# Altium PCB JSTCJ.PcbDoc
Units mm, origin at the board's own origin, x right, y up, seen from the top; angles counter-clockwise.
Board outline 50 x 50 mm, 2 copper layers (Top Layer, Bottom Layer); 15 components, 3 nets, 32 pads, 9 vias.
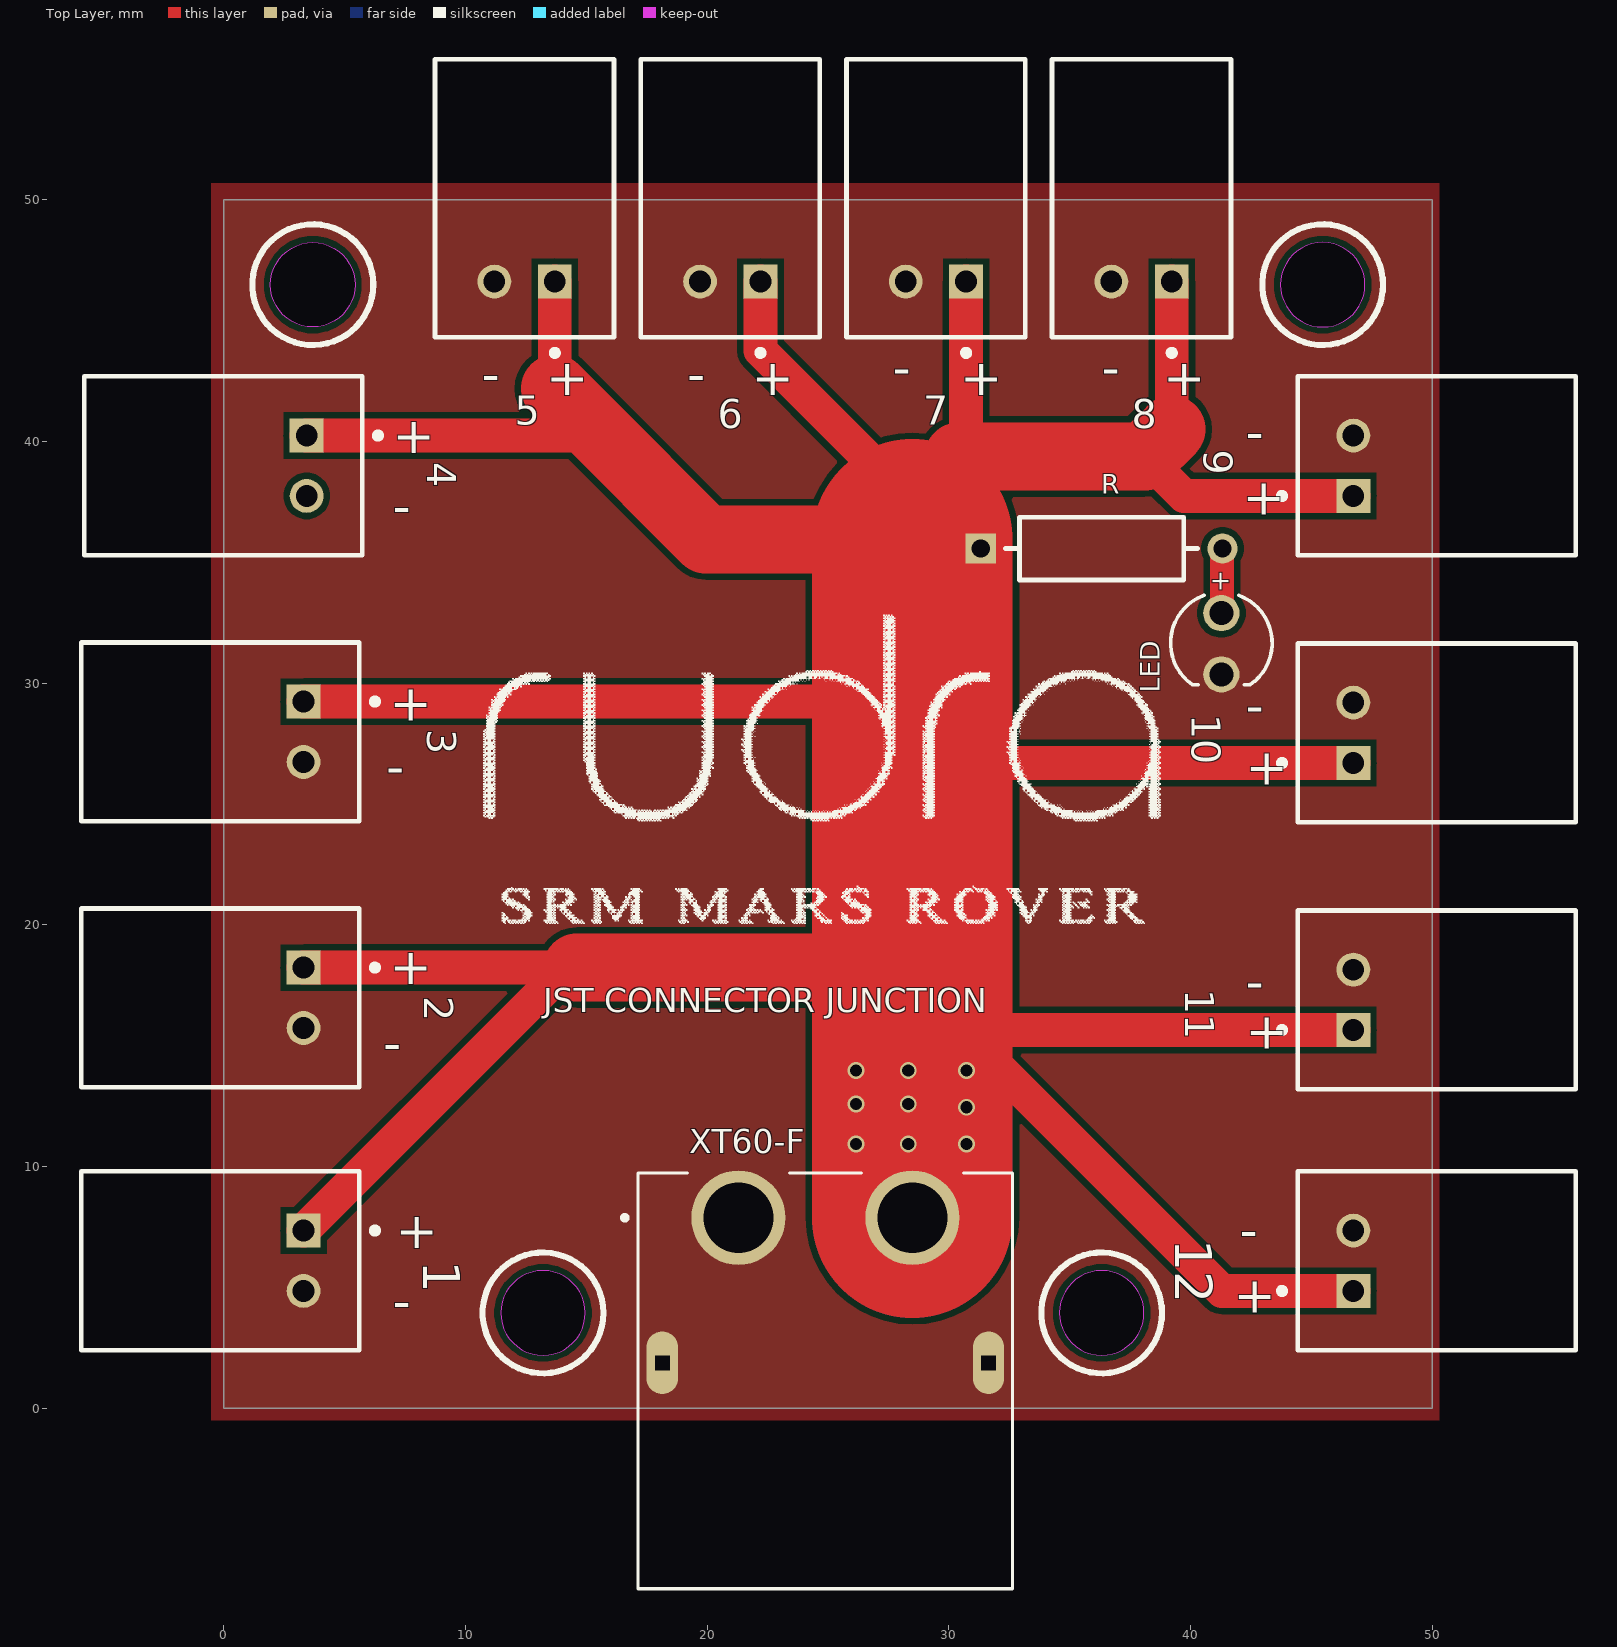
[diagram p0: Top Layer view]
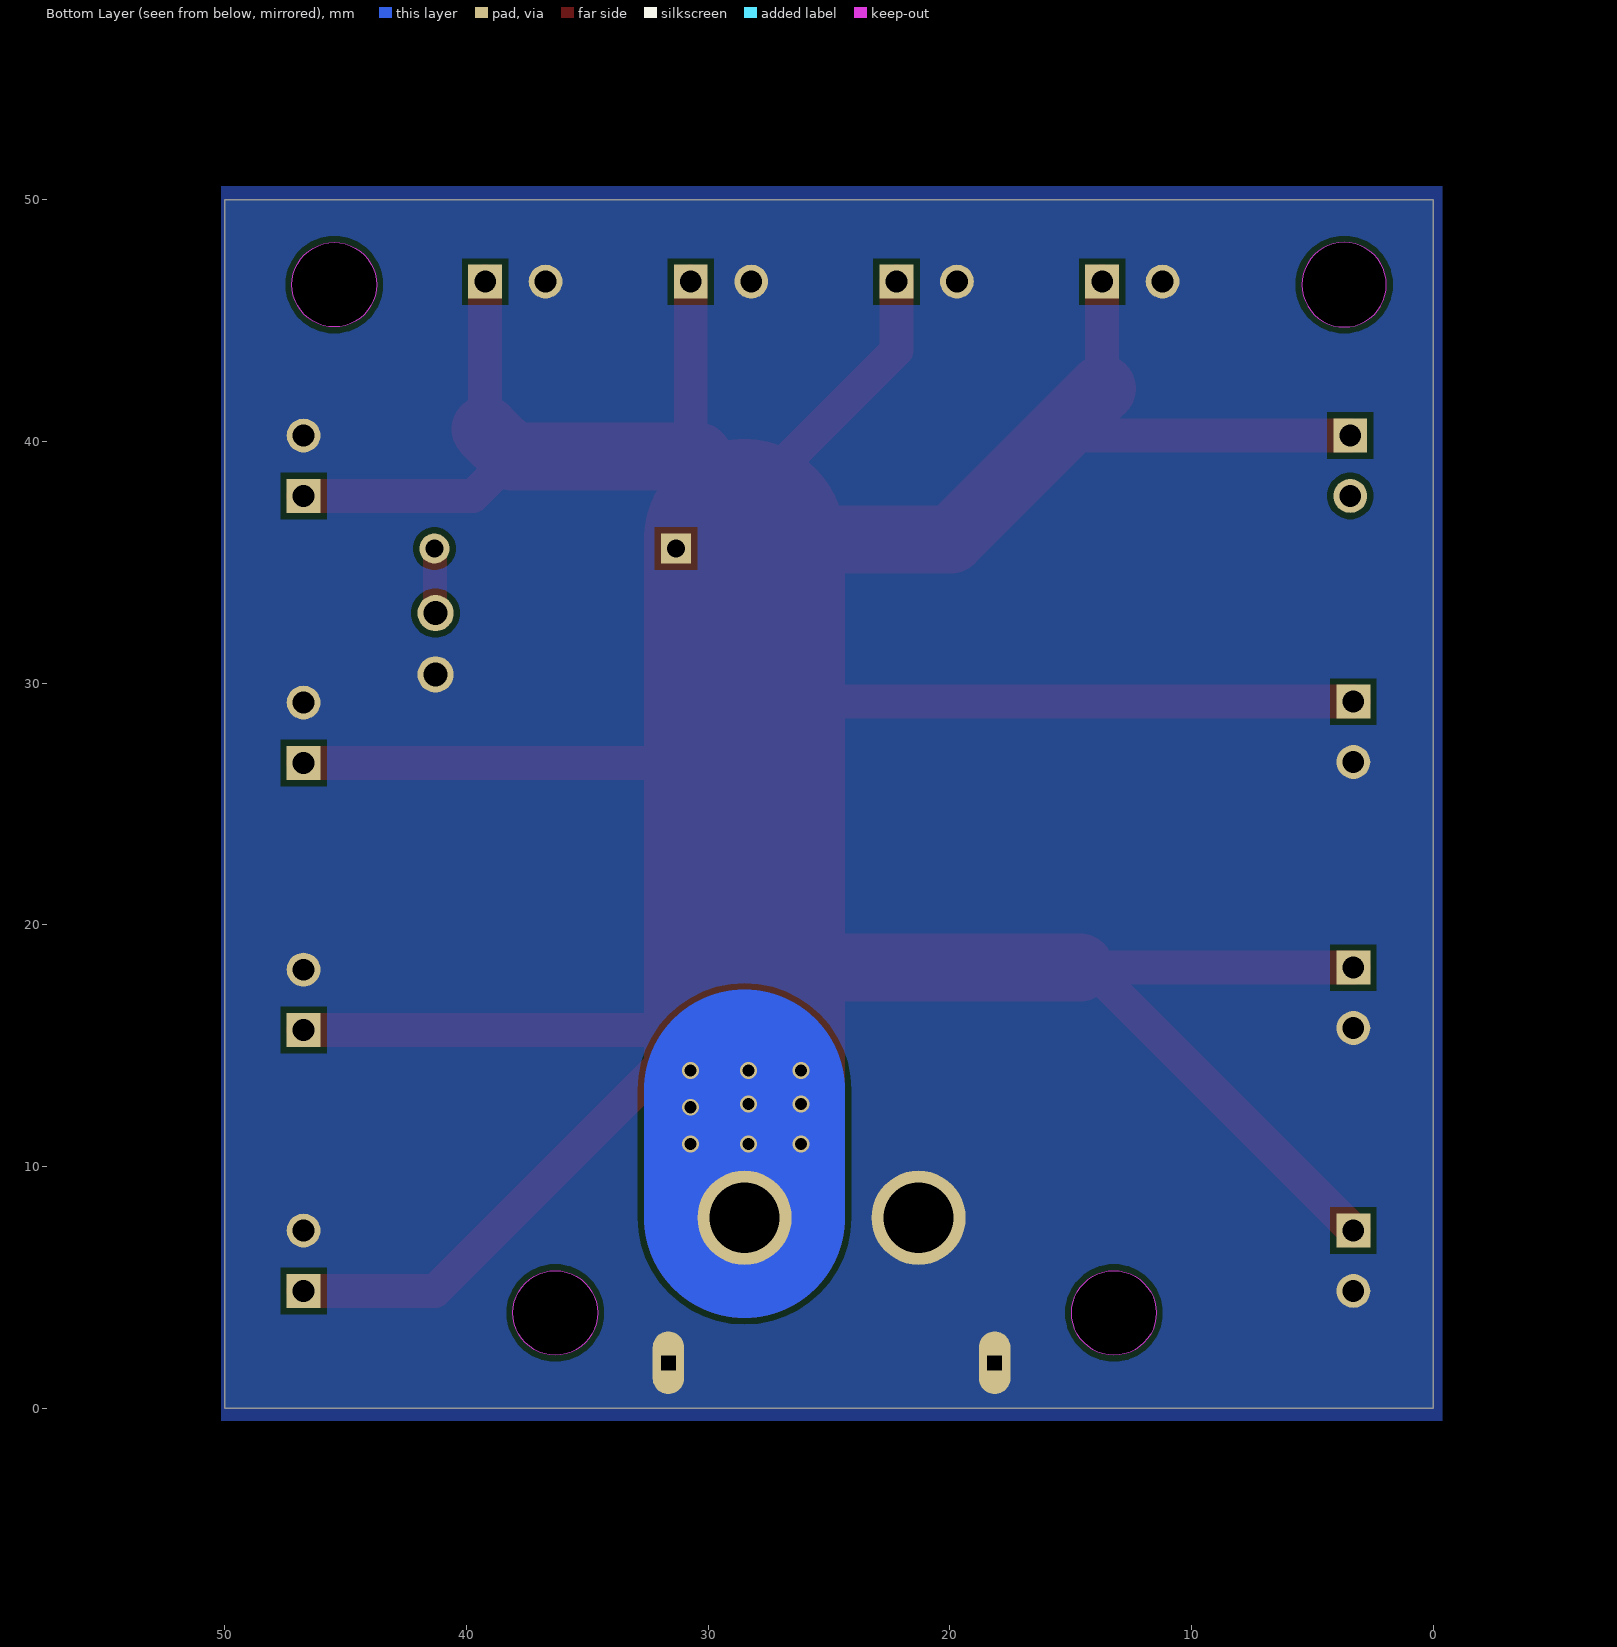
[diagram p1: Bottom Layer view, seen from below]
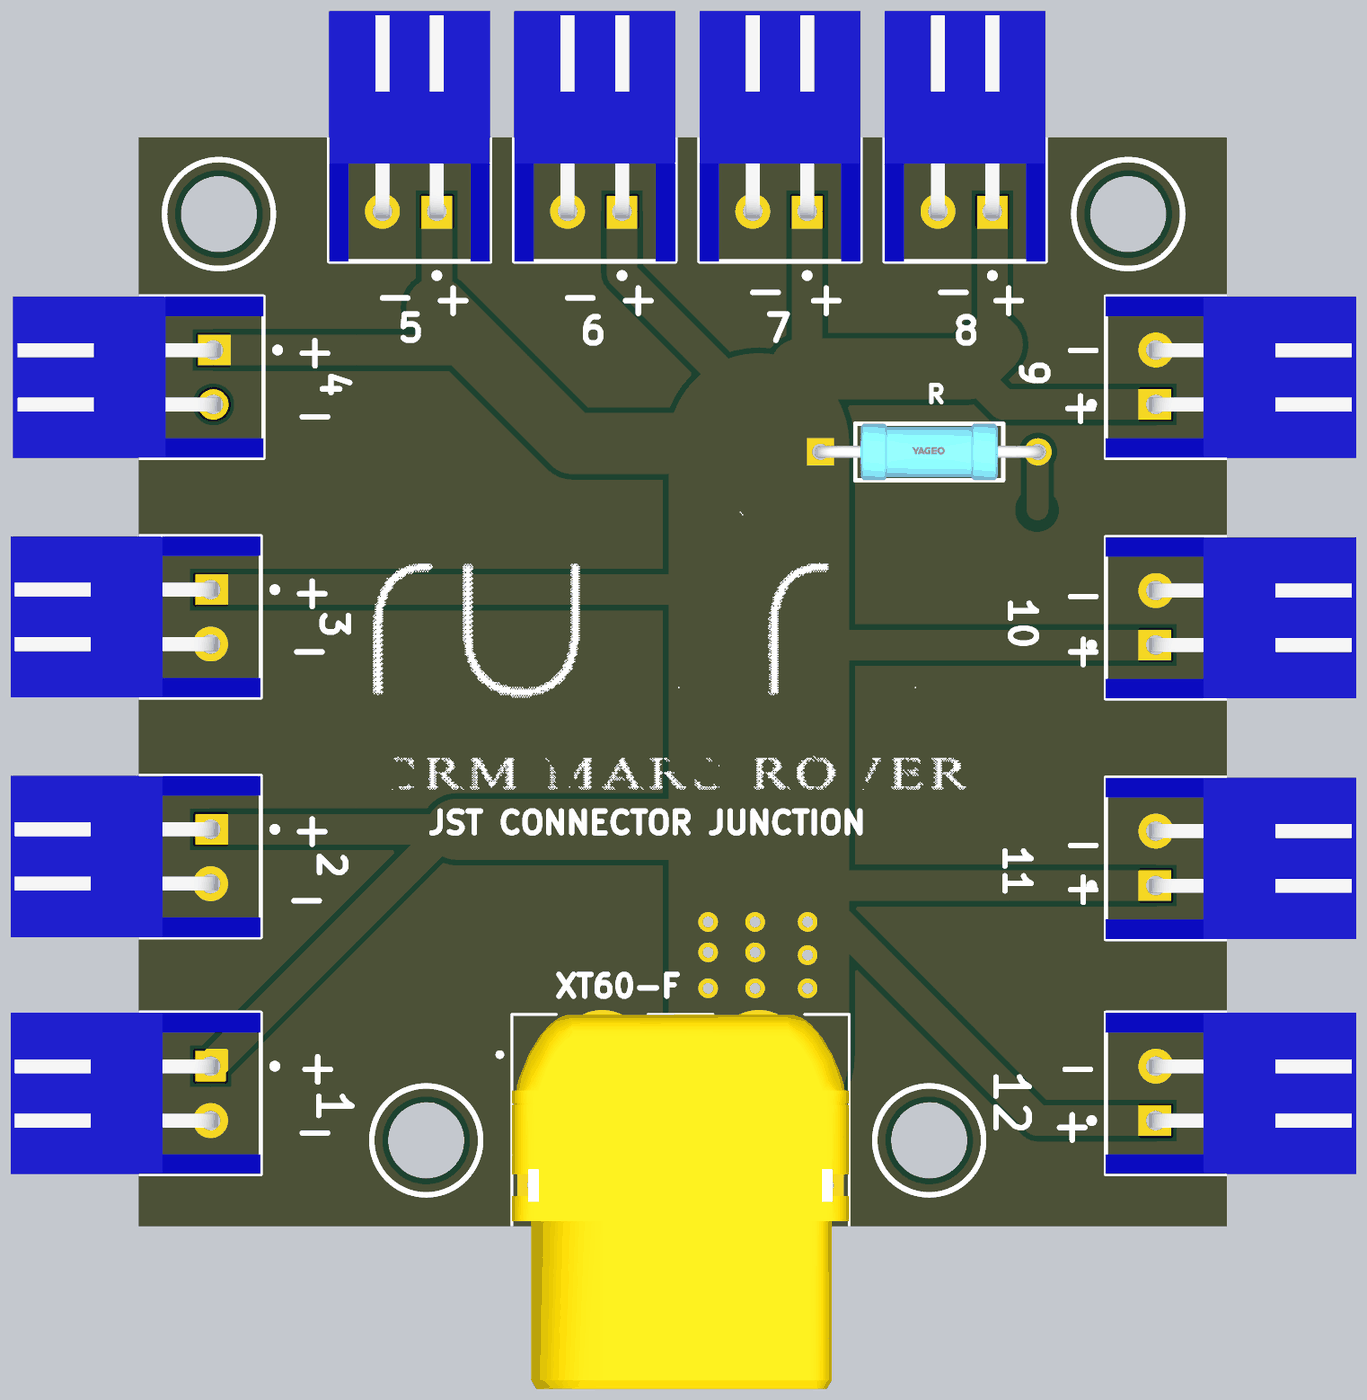
[diagram p2: 3D render of the assembled board from above, using the file's embedded part models]

## Layer stack, top to bottom
Top Solder: solder mask 0.0102, Solder Resist, Dk 3.5
Top Layer: signal copper 0.0356
Dielectric 1: dielectric 0.32, FR-4, Dk 4.8
Bottom Layer: signal copper 0.0356
Bottom Solder: solder mask 0.0102, Solder Resist, Dk 3.5

## Board outline
0,0 50,0 50,50 0,50
cut-out: 11.458,3.937 ccw(c13.208,3.937) 13.208,2.187 ccw(c13.208,3.937) 14.958,3.937 ccw(c13.208,3.937) 13.208,5.687 ccw(c13.208,3.937)
cut-out: 34.572,3.937 ccw(c36.322,3.937) 36.322,2.187 ccw(c36.322,3.937) 38.072,3.937 ccw(c36.322,3.937) 36.322,5.687 ccw(c36.322,3.937)
cut-out: 43.716,46.482 ccw(c45.466,46.482) 45.466,44.732 ccw(c45.466,46.482) 47.216,46.482 ccw(c45.466,46.482) 45.466,48.232 ccw(c45.466,46.482)
cut-out: 3.683,44.732 cw(c3.683,46.482) 1.933,46.482 cw(c3.683,46.482) 3.683,48.232 cw(c3.683,46.482) 5.433,46.482 cw(c3.683,46.482)

## Design rules (kind name [scope] priority, off if disabled: settings)
Clearance [All] p1: gap=0.254 ignorepadtopadclearanceinfootprint=FALSE
HoleSize [All] p1: absolutevalues=TRUE maxlimit=5 minlimit=0.025 maxpercent=80.000 minpercent=20.000
PolygonConnect [All] p1: connectstyle=Direct reliefconductorwidth=0.254 reliefentries=4 polygonreliefangle="90 Angle" airgapwidth=0.254
RoutingVias [All] p1: holewidth=0.711 width=1.27 viastyle="Through Hole" minholewidth=0.711 minwidth=1.27 maxholewidth=0.711 maxwidth=1.27
SolderMaskExpansion [All] p1: expansion=0.102 istentingtop=FALSE
Width [All] p1: maxlimit=10 minlimit=0.254 preferedwidth=0.254 minimp=50.000000 maximp=50.000000 favimp=50.000000
29 further rules are at their usual default settings.

## Components (designator, comment, footprint, x,y, rotation, side; value= is the part's Value field where it differs from the comment)
1 "S2B-XH-A(LF)(SN)" JST-S2B-XH-A(LF)(SN)_V 3.302,6.096 r270 top
2 "S2B-XH-A(LF)(SN)" JST-S2B-XH-A(LF)(SN)_V 3.302,16.976 r270 top
3 "S2B-XH-A(LF)(SN)" JST-S2B-XH-A(LF)(SN)_V 3.302,27.982 r270 top
4 "S2B-XH-A(LF)(SN)" JST-S2B-XH-A(LF)(SN)_V 3.429,38.989 r270 top
5 "S2B-XH-A(LF)(SN)" JST-S2B-XH-A(LF)(SN)_V 12.446,46.609 r180 top
6 "S2B-XH-A(LF)(SN)" JST-S2B-XH-A(LF)(SN)_V 20.955,46.609 r180 top
7 "S2B-XH-A(LF)(SN)" JST-S2B-XH-A(LF)(SN)_V 29.464,46.609 r180 top
8 "S2B-XH-A(LF)(SN)" JST-S2B-XH-A(LF)(SN)_V 37.973,46.609 r180 top
9 "S2B-XH-A(LF)(SN)" JST-S2B-XH-A(LF)(SN)_V 46.736,38.989 r90 top
10 "S2B-XH-A(LF)(SN)" JST-S2B-XH-A(LF)(SN)_V 46.736,27.94 r90 top
11 "S2B-XH-A(LF)(SN)" JST-S2B-XH-A(LF)(SN)_V 46.736,16.891 r90 top
12 "S2B-XH-A(LF)(SN)" JST-S2B-XH-A(LF)(SN)_V 46.736,6.096 r90 top
LED "151031YS05900" WL-TMRC_D3.95H5.3 1311.275,-1238.377 r270 top
R "MFR-25FBF52-1K18" FP-MFR-25-MFG 36.322,35.56 r0 top value=1.18kΩ
XT60-F "XT60PW-F" AMASS_XT60PW-F 24.892,7.874 r0 top

## Footprints (in the part's own frame and the unit in brackets; to place one, negate y for a bottom-side part, rotate by r counter-clockwise, add the part's x,y. Pads: shape width x height; smd on the part's side, far side on the other; paste and mask are expansions set on the pad)
AMASS_XT60PW-F [mm]
  round 3.9 hole 2.9: 1(-3.6,0) 2(3.6,0)
  oval 1.3x2.6 hole 0.6 square: S1(-6.75,-6) S2(6.75,-6)
  silkscreen extent -8.4,-15.35 7.75,1.85, body extent -7.75,-15.35 7.75,1.85, height 8.4
FP-MFR-25-MFG [mm]
  rect 1.25x1.25 hole 0.75 paste-2539.97 mask+0: 1(-5,0)
  round 1.25 hole 0.75 paste-2539.97 mask+0: 2(5,0)
  silkscreen extent -3.98,-1.3 3.98,1.3, body extent -5.72,-1.4 5.72,1.4, height 0.25
JST-S2B-XH-A(LF)(SN)_V [mm] "Header, 2-Leads, Body 7.4x11.5mm, Pitch 2.5mm"
  rect 1.4x1.4 hole 0.9: 1(-1.25,0)
  round 1.4 hole 0.9: 2(1.25,0)
  silkscreen extent -3.7,-9.2 3.7,3.08, body extent -3.7,-9.2 3.7,2.3, height 5.95
WL-TMRC_D3.95H5.3 [mm] "THT Mono-color Round Color LED, 2-leads"
  round 1.5 hole 1: 1(-1271.27,-1270) 2(-1268.73,-1270)
  silkscreen extent -1272,-1272.1 -1268.31,-1267.9, body extent -1271.99,-1271.97 -1268.37,-1268.03, height 5.35

## Part data
1 2 3 4 5 6 7 8 9 10 11 12: library part CMP-002-00032-2, "Male Header, Pitch 2.5 mm, 1 x 2 Position, Height 6.1 mm, Tail Length 3.4 mm, -25 to 85 degC, RoHS, Bulk", Manufacturer=JST, Max Operating Temperature=85°C, Min Operating Temperature=-25°C, Package Description="XH Series Disconnectable Crimp Style Connector, Pitch 2.5 mm, 1 x 2 Position, Height 6.1 mm, Tail Length 3.4 mm", Case/Package=S2B-XH-A(LF)(SN), Connector Type=Header, Datasheet URL=http://www.jst-mfg.com/product/pdf/eng/eXH.pdf, Datasheet Version=May-16, Gender=Male, Manufacturer URL=http://www.jst.com/home2.html, Mounting Technology=TH, Package Reference=S2B-XH-A(LF)(SN), RoHS Compliant=Unknown
LED: library part CMP-1488-00003-2, Case/Package=Radial, Color=Yellow, Forward Current=100mA, Forward Voltage=2.1V, Max Operating Temperature=85°C, Max Reverse Voltage (DC)=5V, Min Operating Temperature=-40°C, Test Current=20mA, Dominant Wavelength=590nm, Height=5.3mm, Length=3mm, Lens Size=3mm, Lens Style="Circular, Diffused, Round", Luminous Intensity=30mcd, Mount="Through Hole", NexarPartId=29717806, Packaging=Bulk, Peak Wavelength=585nm, REACH SVHC=Unknown, RoHS=Compliant, Viewing Angle=60°, Wavelength=585nm, Width=3mm
R: library part CMP-03413-000001-1, "RES 1.18K OHM 1/4W 1% AXIAL", Manufacturer=Yageo, Package=MFR-25, Power Rating=0.25W, Resistance=1.18kΩ, Temperature="-55°C to +155°C", Temperature Coefficient=100ppm/°C, Temperature Range High=+155°C, Temperature Range Low=-55°C, Tolerance=1%, Voltage Rating=250V, Automotive=No, Category=Res, ComponentLink2Description=Datasheet, ComponentLink2URL=https://www.yageo.com/upload/media/product/products/datasheet/lr/Yageo_LR_MFR_1.pdf, Composition="Metal Film", Device Class L1="Passive Components", Device Class L2=Resistors, Device Class L3="Through-Hole Resistors", Digikey Description="RES 1.18K OHM 1/4W 1% AXIAL", Height=2.6mm, Ipc Land Pattern Name=RESAD1000W75L680D260, Lead Free=Yes, Manufacturer Part Number=MFR-25FBF52-1K18, Mouser Description="Metal Film Resistors 1.18K OHM 1/4W 1%", Octopart=https://octopart.com/mfr-25fbf52-1k18-yageo-56251681, RoHS=TRUE, Series=MFR
XT60-F: library part CMP-007-000000-1, "Socket DC Supply Connector Female", Package=Package, Availability="Not in stock", Check_prices=https://www.snapeda.com/parts/XT60PW-F/AMASS/view-part/?ref=eda, Component Type=Standard, Design Item ID=XT60PW-F, MF=AMASS, MP=XT60PW-F, Pin Count=4, Price=None, SnapEDA_Link=https://www.snapeda.com/parts/XT60PW-F/AMASS/view-part/?ref=snap, Source=XT60PW-F.SchLib

## Via types
v1: diameter 0.7, hole 0.5, Top Layer to Bottom Layer, 9 vias

## Nets (pads, with @x,y where several pads share a name; then routed paths per layer and width w, separated by ;. In a path a pad name is that pad's centre, name@x,y a point inside that pad or via, vN(x,y) a via of type N, cw(c..) or ccw(c..) an arc to the next point about the centre after c; other vN are vias at no path point)
1': LED.1 R.2 | length 2.7
  Top Layer w0.254: LED.1 LED.1@41.299,32.917 ; R.2@41.299,35.536 R.2
  Top Layer w1: LED.1@41.299,32.917 R.2@41.299,35.536
GND: 1.2 2.2 3.2 5.2 6.2 7.2 8.2 9.2 10.2 11.2 12.2 LED.2 XT60-F.1
VCC: 1.1 2.1 3.1 4.1 5.1 6.1 7.1 8.1 9.1 10.1 11.1 12.1 R.1 XT60-F.2 | length 238.3
  Top Layer w0.254: 14.182,18.226 14.605,18.226 ; 14.458,40.239 15.05,40.831 ; 26.692,29.232 28.492,27.432 29.234,26.69 ; 28.492,17.653 30.504,15.641 ; 28.492,37.719 30.397,39.624
  Top Layer w1.4: 1.1 14.182,18.226 ; 2.1 14.605,18.226 ; 3.1 26.692,29.232 ; 4.1 14.458,40.239 ; 13.696,42.184 5.1 ; 6.1 22.205,43.752 28.492,37.465 ; 29.234,26.69 10.1 ; 30.397,39.624 30.714,39.941 ; 30.714,39.687 30.714,39.941 ; 7.1 30.714,39.941 ; 38.1,39.37 39.731,37.739 9.1 ; 39.223,40.493 8.1 ; 12.1 41.299,4.846 30.504,15.641 11.1
  Top Layer w2.8: 13.696,42.184 15.05,40.831 19.939,35.941 28.492,35.941 ; 14.605,18.226 27.919,18.226 ; 30.397,39.37 38.1,39.37 39.223,40.493
  Top Layer w8.3: XT60-F.2 28.492,10.922 28.492,17.653 28.492,27.432 28.492,35.941
  Bottom Layer w8.3: XT60-F.2 28.492,13.164
  other v1: 26.162,10.922 28.321,10.922 30.734,10.922 30.734,12.446 26.162,12.573 28.321,12.573 26.162,13.97 28.321,13.97 30.734,13.97
pads on no net: 4.2 XT60-F.S1 XT60-F.S2

## Polygon pours and split planes (outlines as drawn)
GND on Bottom Layer "GND_L02_P002" (solid, pour order 2): -0.381,50.546 50.14,50.546 50.14,-0.525 -0.381,-0.525
GND on Top Layer "GND_L01_P003" (solid, pour order 3): -0.508,50.673 50.292,50.673 50.292,-0.508 -0.508,-0.508

## Silkscreen, mask and mechanical layers (free items; w line width, h text height)
Top Overlay:
  drawing of 109 lines, arcs and shapes, not listed
  text "-" at 27.686,42.291 h1.52
  text "-" at 36.322,42.291 h1.52
  text "-" at 10.668,42.037 h1.52
  text "-" at 19.177,42.037 h1.52
  text "+" at 13.335,41.91 h1.52
  text "+" at 21.844,41.91 h1.52
  text "+" at 30.48,41.91 h1.52
  text "+" at 38.862,41.91 h1.52
  text "-" at 42.291,39.624 h1.52
  text "+" at 6.985,39.497 h1.52
  text "+" at 42.164,36.957 h1.52
  text "-" at 6.985,36.576 h1.52
  text "+" at 6.858,28.448 h1.52
  text "-" at 42.291,28.321 h1.52
  text "-" at 6.731,25.781 h1.52
  text "+" at 42.291,25.781 h1.52
  text "+" at 6.858,17.526 h1.52
  text "-" at 42.291,16.891 h1.52
  text "JST CONNECTOR JUNCTION" at 13.208,16.383 h1
  text "+" at 42.291,14.859 h1.52
  text "-" at 6.604,14.351 h1.52
  text "+" at 7.112,6.604 h1.52
  text "-" at 42.037,6.604 h1.52
  text "+" at 41.783,3.937 h1.52
  text "-" at 6.985,3.683 h1.52

## Text inside footprints (layer, text, board x,y; h text height)
LED: Top Overlay "+" at 40.925,34.673 h0.8 r270